# Altium PCB PCB2.PcbDoc
Units mil, origin at the board's own origin, x right, y up, seen from the top; angles counter-clockwise.
Board outline 1775 x 1520 mil, 2 copper layers (Top Layer, Bottom Layer); 39 components, 26 nets, 118 pads, 437 vias.
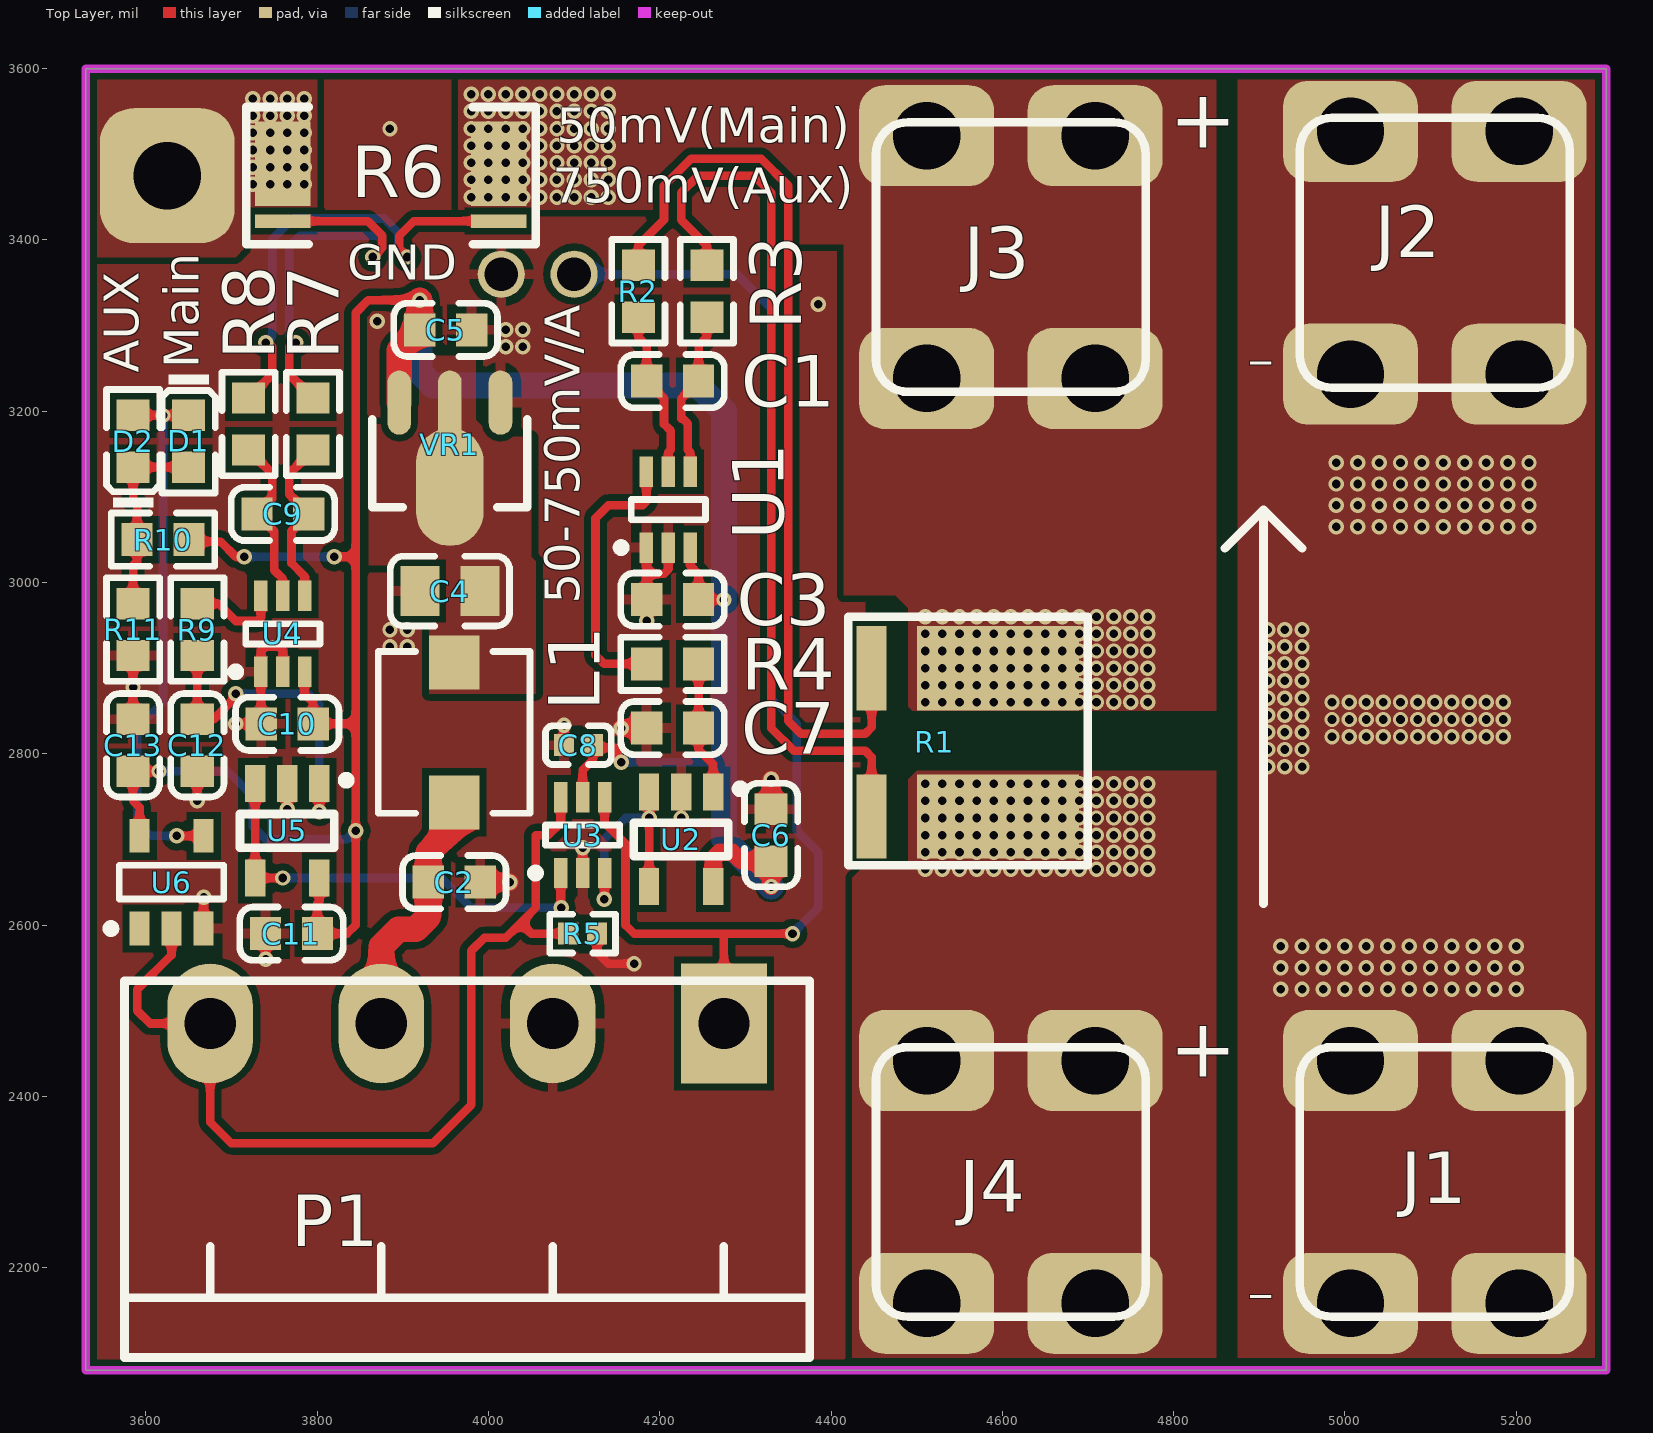
[diagram p0: Top Layer view]
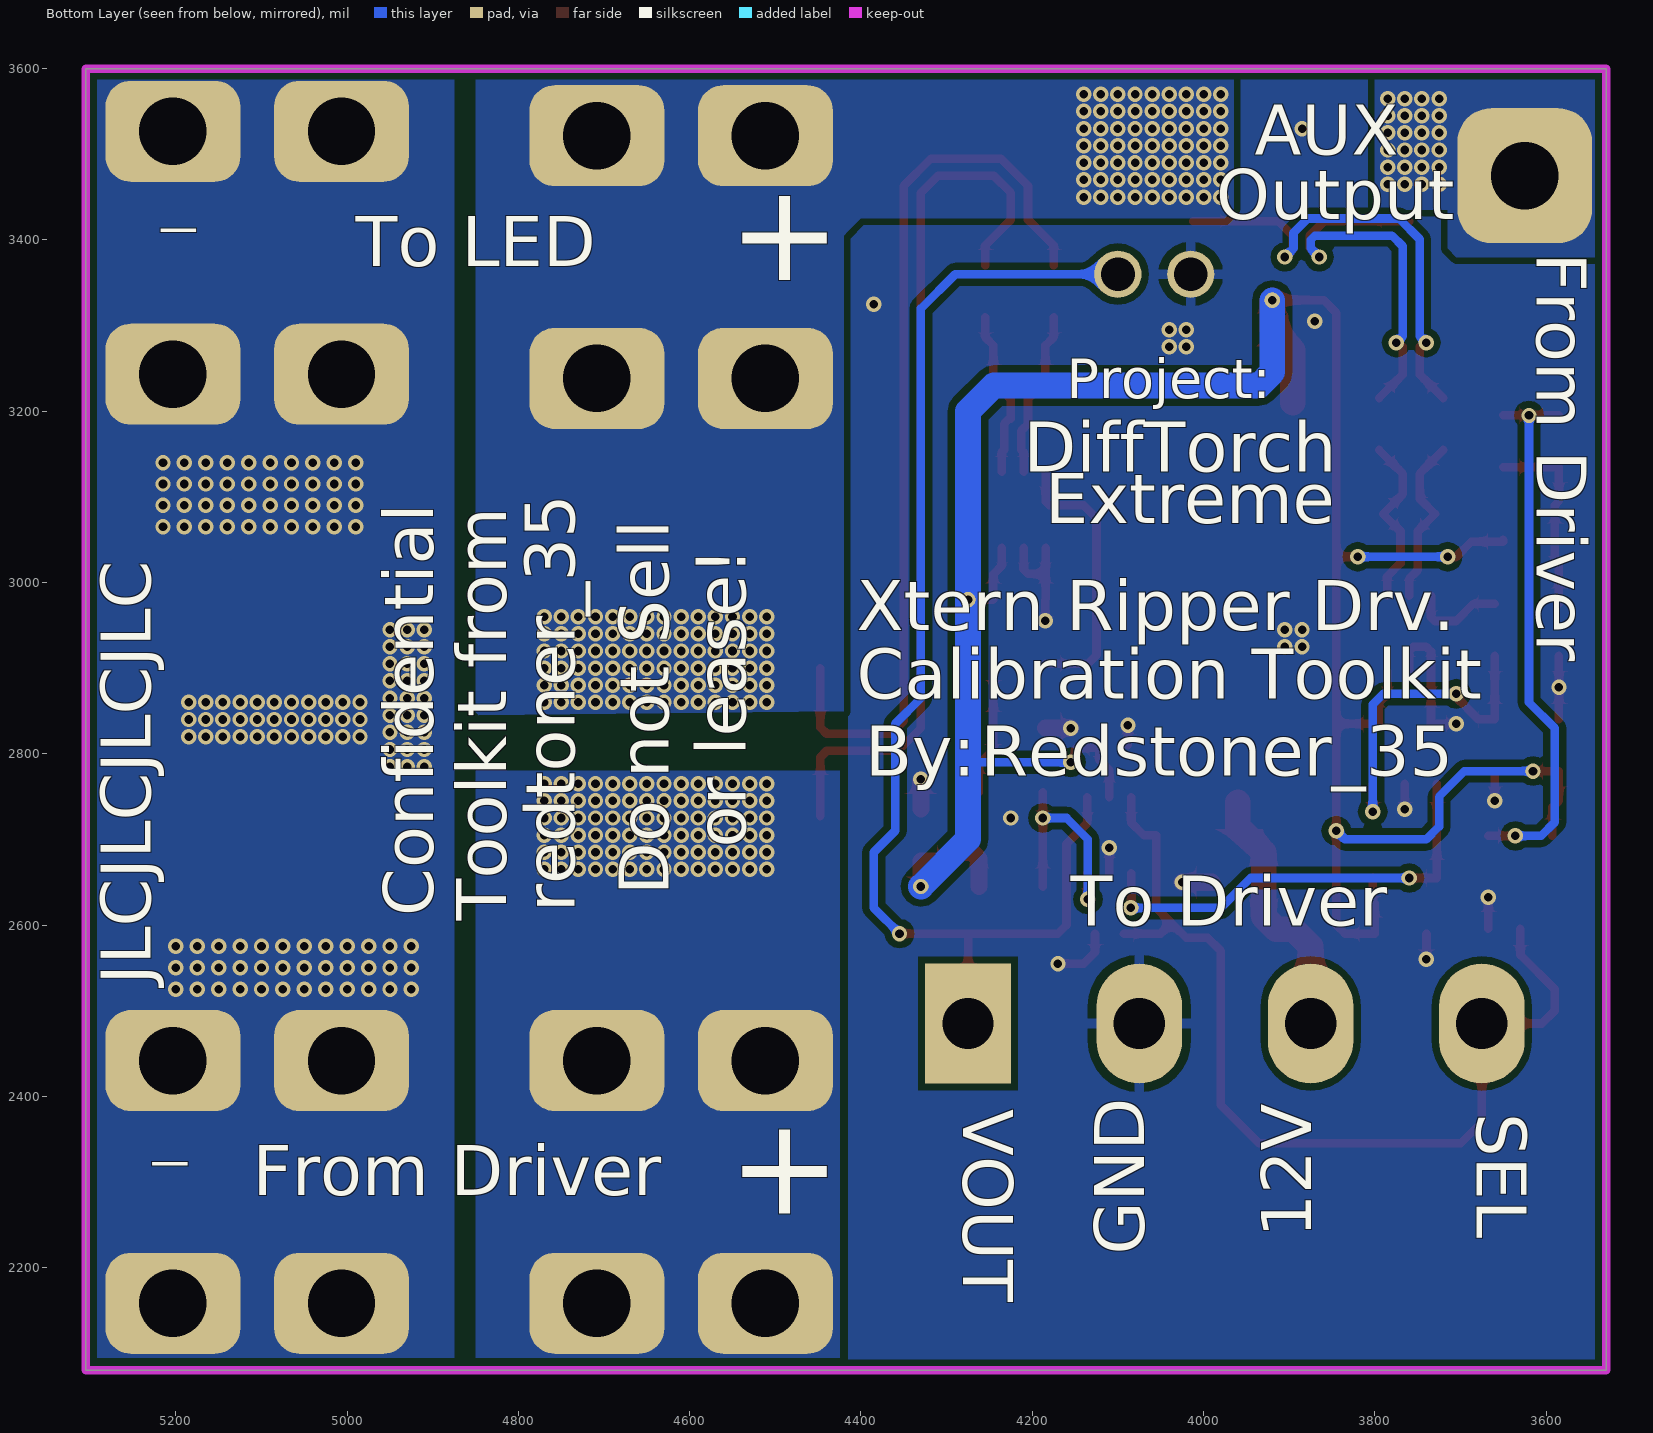
[diagram p1: Bottom Layer view, seen from below]
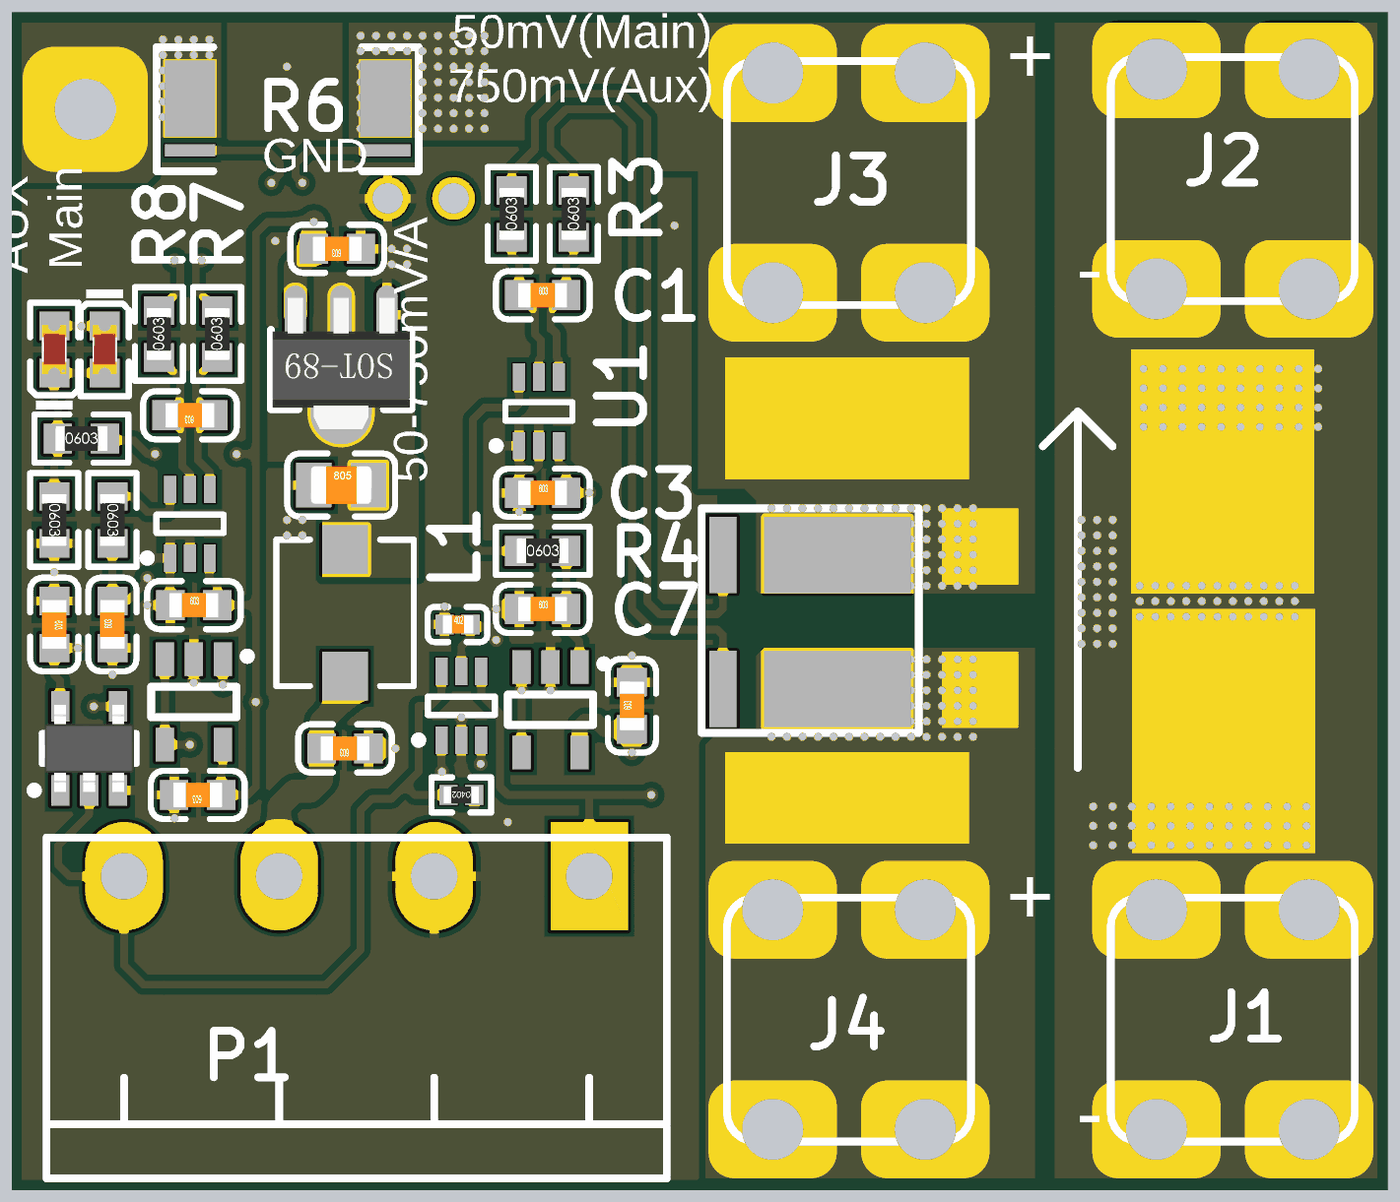
[diagram p2: 3D render of the assembled board from above, using the file's embedded part models]

## Layer stack, top to bottom
Top Solder: solder mask 0.4, Solder Resist, Dk 3.5
Top Layer: signal copper 1.4
Dielectric 1: dielectric 12.6, FR-4, Dk 4.8
Bottom Layer: signal copper 1.4
Bottom Solder: solder mask 0.4, Solder Resist, Dk 3.5

## Board outline
3530,2080 5305,2080 5305,3600 3530,3600

## Design rules (kind name [scope] priority, off if disabled: settings)
Clearance [All] p1: gap=8
DiffPairsRouting [All] p1: maxlimit=10 minlimit=10 mostfreqgap=10 toplayer_minwidth=10 toplayer_maxwidth=13 toplayer_prefwidth=12 bottomlayer_minwidth=10 bottomlayer_maxwidth=13 bottomlayer_prefwidth=12 maxuncoupledlength=500
PolygonConnect PolygonConnect_1 [IsVia] p1: connectstyle=Direct reliefconductorwidth=10 reliefentries=4 polygonreliefangle="90 Angle" airgapwidth=10
PolygonConnect [All] p2: connectstyle=Relief reliefconductorwidth=12 reliefentries=4 polygonreliefangle="90 Angle" airgapwidth=10
RoomDefinition main [InComponentClass('main')] p1: confinementstyle=ConfineIn formatcopy=TRUE lockcomponents=FALSE outline 7045,1060 10275,1060 10275,1655 7045,1655
RoutingVias [All] p1: holewidth=28 width=50 viastyle="Through Hole" minholewidth=28 minwidth=50 maxholewidth=28 maxwidth=50
SolderMaskExpansion [All] p1: expansion=4
Width [All] p1: maxlimit=100 minlimit=10 preferedwidth=10
29 further rules are at their usual default settings.

## Classes and differential pairs
differential pair AS: +AS_P -AS_N
differential pair AUXSENS: +AUXSENS_P -AUXSENS_N
differential pair SENS: +SENS_P -SENS_N
differential pair S: +S_P -S_N

## Components (designator, comment, footprint, x,y, rotation, side; value= is the part's Value field where it differs from the comment)
C1 "68nF (683) 10% 50V" 0603_C 4215,3235 r0 top
C2 "100nF (104) 10% 50V" 0603_C 3960,2650 r180 top
C3 "10uF (106) 10% 10V" 0603_C 4215,2980 r0 top
C4 "22uF (226) 20% 25V" 0805_C 3955,2990 r0 top
C5 "100nF (104) 10% 50V" 0603_C 3950,3295 r180 top
C6 "100nF (104) 10% 50V" 0603_C 4330,2705 r90 top
C7 "1uF (105) 10% 50V" 0603_C 4215,2830 r0 top
C8 "100nF (104) 10% 16V" 0402_C 4105,2810 r0 top
C9 "68nF (683) 10% 50V" 0603_C 3760,3080 r180 top
C10 "100nF (104) 10% 50V" 0603_C 3765,2835 r0 top
C11 "100nF (104) 10% 50V" 0603_C 3770,2590 r180 top
C12 "1uF (105) 10% 50V" 0603_C 3660,2810 r90 top
C13 "100nF (104) 10% 50V" 0603_C 3585,2810 r270 top
D1 "绿灯 0603" 0603_LED_S1 3650,3165 r270 top
D2 "黄灯 0603" 0603_LED_S1 3585,3165 r90 top
J1 "K14" k14端子 5105,2300 r0 top
J2 "K14" k14端子 5105,3385 r0 top
J3 "K14" k14端子 4610,3380 r0 top
J4 "K14" k14端子 4610,2300 r0 top
L1 "0420" IND0420 3960,2825 r90 top
P1 "CON 4" KF2EDGR5.08/4 4275,2485 r180 top
R1 "6669 1mR" Shunt6669 4595,2900 r270 top locked
R2 "10Ω (10R0) ±1%" 0603_R 4175,3340 r90 top
R3 "10Ω (10R0) ±1%" 0603_R 4255,3340 r90 top
R4 "2KΩ (2001) ±1%" 0603_R 4215,2905 r0 top
R5 "10KΩ (1002) ±1%" 0402_R 4110,2590 r180 top
R6 "2512 15mR" 2512-Virtual4Wire 3760,3485 r0 top
R7 "10Ω (10R0) ±1%" 0603_R 3795,3185 r90 top
R8 "10Ω (10R0) ±1%" 0603_R 3720,3185 r90 top
R9 "2KΩ (2001) ±1%" 0603_R 3660,2945 r270 top
R10 "4.7KΩ (4701) ±1%" 0603_R 3620,3050 r0 top
R11 "4.7KΩ (4701) ±1%" 0603_R 3585,2945 r270 top
U1 "INA199A1DCKR" SC70-6 4210,3085 r90 top
U2 "LMV321IDBVRG4" SOT-23-5 4225,2700 r90 top
U3 "CH443k" SC70-6 4110,2705 r90 top
U4 "INA199A1DCKR" SC70-6 3760,2940 r90 top
U5 "LMV321IDBVRG4" SOT-23-5 3765,2710 r90 top
U6 "SN74LVC1G17DBVR" DBV0005A_N 3630,2650 r90 top
VR1 "HT7533-1" SOT-89(SOT-89-3) 3955,3210 r90 top

## Footprints (in the part's own frame and the unit in brackets; to place one, negate y for a bottom-side part, rotate by r counter-clockwise, add the part's x,y. Pads: shape width x height; smd on the part's side, far side on the other; paste and mask are expansions set on the pad)
0402_C [mm]
  rect 0.6x0.65 smd mask+0.051: 1(-0.425,0) 2(0.425,0)
  silkscreen extent -0.97,-0.58 0.97,0.58, body extent -0.48,-0.3 0.52,0.3, height 0.2
0402_R [mm]
  rect 0.6x0.65 smd mask+0.051: 1(-0.425,0) 2(0.425,0)
  silkscreen extent -0.97,-0.58 0.97,0.58, body extent -0.57,-0.27 0.58,0.28, height 0.41
0603_C [mm]
  rect 0.93x0.98 smd: 1(-0.77,0) 2(0.77,0)
  silkscreen extent -1.53,-0.79 1.54,0.79, body extent -0.8,-0.4 0.8,0.4, height 0.3
0603_LED_S1 [mm]
  rect 0.93x0.98 smd: A(0.77,0) K(-0.77,0)
  silkscreen extent -1.98,-0.79 1.54,0.79, body extent -0.8,-0.4 0.8,0.4, height 0.6
0603_R [mm]
  rect 0.93x0.98 smd: 1(-0.77,0) 2(0.77,0)
  silkscreen extent -1.53,-0.79 1.54,0.79, body extent -0.85,-0.4 0.85,0.4, height 0.56
0805_C [mm]
  rect 1.16x1.47 smd: 1(-0.89,0) 2(0.89,0)
  silkscreen extent -1.77,-1.04 1.77,1.04, body extent -1,-0.62 1,0.63, height 0.77
2512-Virtual4Wire [mm] "2512 Shunt Resistor Virtual 4Wire Connection"
  rect 1.65x2.5 smd mask+0.05: 0(0,0.1) 1(6.401,0.1)
  rect 1.65x0.4 smd mask+0.05: 2(0,-1.6) 3(6.401,-1.6)
  silkscreen extent -1.09,-2.28 7.49,1.78, body extent 0,-1.78 6.48,1.4, height 1
DBV0005A_N [mm] "SOT23, 5-Leads, Body 3.05x1.75mm, Pitch 0.95mm, IPC Medium Density"
  rect 1x0.6 smd: 1(-1.375,0.95) 2(-1.375,0) 3(-1.375,-0.95) 4(1.375,-0.95) 5(1.375,0.95)
  silkscreen extent -1.5,-1.55 0.5,1.92, body extent -1.42,-1.46 1.42,1.46, height 1.45
IND0420 [mm] "Molded Inductor, 2-Leads, Body 4.67x4.45mm, IPC Medium Density"
  rect 1.6x1.5 smd: 1(-2.075,0) 2(2.075,0)
  silkscreen extent -2.4,-2.25 2.4,2.25, body extent -2.37,-2.25 2.38,2.25, height 2
k14端子 [mm]
  rrect50% 4x3 hole 2: 1(-2.5,-3.6) 1(-2.5,3.6) 1(2.5,-3.6) 1(2.5,3.6)
  silkscreen extent -4,-4 4,4
KF2EDGR5.08/4 [mil]
  rect 100x140 hole 60: 1(0,0)
  oval 100x140 hole 60: 2(200,0) 3(400,0) 4(600,0)
  silkscreen extent -100,-50 700,390
SC70-6 [mm] "SOT23, 6-Leads, Body 2.00x2.10mm, Pitch 0.65mm, IPC Medium Density"
  rect 0.9x0.4 smd mask+0.05: 1(-1.125,0.65) 2(-1.125,0) 3(-1.125,-0.65) 4(1.125,-0.65) 5(1.125,0) 6(1.125,0.65)
  silkscreen extent -1.25,-1.1 0.3,1.52, body extent -0.67,-1.1 0.67,1.1, height 1.1
Shunt6669 [mm] "Shunt Res 1mR 4W 4wire"
  rect 2.5x4.8 smd: 0(0,0) 1(4.4,0)
  rect 2.5x0.9 smd: 2(0,-3.75) 3(4.4,-3.75)
  silkscreen extent -1.52,-4.44 5.84,2.67
SOT-23-5 [mm]
  rect 1.1x0.6 smd: 1(1.4,-0.95) 2(1.4,0) 3(1.4,0.95) 4(-1.4,0.95) 5(-1.4,-0.95)
  silkscreen extent -0.5,-1.88 1.62,1.4
SOT-89(SOT-89-3) [mm]
  oval 1.9x0.7 smd: 1(0,-1.5) 3(0,1.5)
  oval 3.5x2 smd: 2(-2.5,0)
  oval 2.1x0.7 smd: 2(-0.1,0)
  silkscreen extent -3.1,-2.3 -0.5,2.3, body extent -3.75,-2.25 0.55,2.25, height 1.51

## Part data
C1 C9: library part "0603 68nF (683) 10% 50V", "贴片电容"
C2 C5 C6 C10 C11 C13: library part "0603 100nF (104) 10% 50V", "贴片电容"
C3: library part "0603 10uF (106) 10% 10V", "贴片电容"
C4: library part "0805 22uF (226) 20% 25V", "贴片电容"
C7 C12: library part "0603 1uF (105) 10% 50V", "贴片电容"
C8: library part "0402 100nF (104) 10% 16V", "贴片电容"
D1: library part "0603 绿灯", "发光二极管"
D2: library part "0603 黄灯", "发光二极管"
J1 J2 J3 J4: library part "Con 1"
L1: library part "Inductor Iron", "Magnetic-Core Inductor"
P1: "4-Pin"
R1: library part shunt, "4wire shunt 6669 1mR"
R2 R3 R7 R8: library part "0603 10Ω (10R0) 1%", "贴片电阻"
R4 R9: library part "0603 2KΩ (2001) 1%", "贴片电阻"
R5: library part "0402 10KΩ (1002) 1%", "贴片电阻"
R6: library part shunt, "2512检流电阻 15mR"
R10 R11: library part "0603 4.7KΩ (4701) 1%", "贴片电阻"
U1 U4: library part INA199A2DCKR, "50Khz 50V/V 26V Max High Side Current Op Amp."
U2 U5: library part LMV321IDBVRG4_[C7972], "运放"
U3: library part NC7SB3157P6X, "Low-Voltage Analog Switch SPDT,1.8-5V Power"
U6: "Single Schmitt-Trigger Buffer, DBV0005A, LARGE T&R"
VR1: library part "SOT-89 HT7533-1", "低压差线性稳压(LDO)"

## Free pads (board coordinates)
  rrect50% 157.48x157.48 hole 78.74 mask+1.97: 0(3625,3475)
  round 55.12 hole 39.37 mask+1.97: 1(4015,3360) 2(4100,3360)

## Via types
v1: diameter 18, hole 10, Top Layer to Bottom Layer, tented both sides, 437 vias

## Nets (pads, with @x,y where several pads share a name; then routed paths per layer and width w, separated by ;. In a path a pad name is that pad's centre, name@x,y a point inside that pad or via, vN(x,y) a via of type N, cw(c..) or ccw(c..) an arc to the next point about the centre after c; other vN are vias at no path point)
3V3: C3.2 C5.2 C6.1 C8.2 C10.2 C11.1 C13.2 R10.2 U1.3 U2.5 U3.5 U4.3 U5.5 U6.5 VR1.3 | length 3250
  Top Layer w10: U6.5 3592.6,2737.4 3585,2745 C13.2 v1(3615.32,2779.68) ; R10.2 3650.32,3047.71 3687.29,3047.71 3705,3030 v1(3715,3030) ; U4.3 3785,2895.12 3785,2870 3795.32,2859.68 C10.2 3845,2835 ; U5.5 3802.4,2627.4 3800.32,2625.32 C11.1 3835,2590 3845,2600 v1(3845,2710) 3845,2835 ; v1(3820,3030) 3845,3030 ; v1(3919.68,3329.68) 3859.68,3329.68 3845,3315 3845,3030 ; U3.5 4110,2781.13 4121.73,2792.86 C8.2@4121.73,2807 ; C8.2 C8.2@4121.73,2807 ; v1(4155,2790) 4150,2795 4150,2805 4148,2807 C8.2@4121.73,2807 ; U1.3 4235.59,3019.41 4245.31,3009.68 C3.2 v1(4275,2980) ; 3845,2835 3845,3030
  Top Layer w20: U2.5 4262.4,2677.4 4270,2685 4285,2685 4295.31,2674.68 C6.1 v1(4330,2645)
  Top Layer w30: VR1.3 3895.94,3271.26 C5.2 v1(3919.68,3329.68)
  Bottom Layer w10: v1(3615.32,2779.68) 3695.32,2779.68 3725,2750 3725,2715 3740,2700 3835,2700 v1(3845,2710) ; v1(3715,3030) v1(3820,3030) ; v1(4155,2790) 4270,2790
  Bottom Layer w30: v1(3919.68,3329.68) 3919.68,3245.32 3935,3230 4245,3230 4275,3200 v1(4275,2980) 4275,2700 v1(4330,2645)
12V: C2.2 L1.1 P1.3 | length 305.2
  Top Layer w30: P1.3 3875,2575 3895,2595 3915,2595 3929.68,2609.68 C2.2 3929.68,2684.68 3960,2715 L1.1
AS_N: R6.3 R8.2 | length 543.6
  Top Layer w10: R8.2 3747.5,3242.82 3747.5,3275 ; v1(3905,3380) 3896,3389 3896,3405 3913.01,3422.01 R6.3
  Bottom Layer w10: v1(3740,3280) 3747.5,3287.5 3747.5,3400.78 3771.72,3425 3878.28,3425 3895,3408.28 3895,3390 v1(3905,3380)
AS_P: R6.2 R7.2 | length 478.2
  Top Layer w10: R6.2 3859,3422.01 3876,3405 3876,3391 v1(3865,3380) ; 3767.5,3275 3767.5,3242.82 R7.2
  Bottom Layer w10: v1(3775,3280) 3767.5,3287.5 3767.5,3392.5 3780,3405 3870,3405 3875,3400 3875,3390 v1(3865,3380)
AUXBUCK: pad.0 R6.0
  other v1: 3725,3465 3745,3465 3765,3465 3785,3465 3725,3485 3745,3485 3765,3485 3785,3485 3725,3505 3745,3505 3765,3505 3785,3505 3725,3525 3745,3525 3765,3525 3785,3525 3725,3545 3745,3545 3765,3545 3785,3545 3725,3565 3745,3565 3765,3565 3785,3565
AUXSENS_N: C9.2 R8.1 U4.5 | length 201.7
  Top Layer w10: R8.1 3747.5,3127.19 3747.5,3097.82 C9.2 3750,3059.68 3750,3014.31 3760,3004.31 U4.5
AUXSENS_P: C9.1 R7.1 U4.4 | length 206.1
  Top Layer w10: U4.4 3785.59,3007.01 3770,3022.6 3770,3059.68 C9.1 3767.5,3102.82 3767.5,3127.19 R7.1
AUXVO: U3.1 U5.3 U5.4 | length 523
  Top Layer w10: U5.3 U5.4 v1(3759.88,2654.88) ; U3.1 4084.41,2620.59 v1(4085,2620)
  Bottom Layer w10: v1(3759.88,2654.88) 3945.12,2654.88 3980,2620 v1(4085,2620)
AUXVOUT: R9.1 U4.6 | length 109.5
  Top Layer w10: R9.1 3684.69,2975.31 3705,2955 3730,2955 3734.41,2959.41 U4.6
GND: C2.1 C3.1 C4.1 C5.1 C6.2 C7.1 C8.1 C10.1 C11.2 C12.1 C13.1 P1.2 pad.1 R5.1 R11.2 U1.1 U1.2 U2.2 U3.2 U4.1 U4.2 U5.2 U6.3 VR1.1 | length 734.7
  Top Layer w10: C13.1 R11.2 ; v1(3660,2745) C12.1 ; U6.3 v1(3667.4,2632.6) ; v1(3705,2835) C10.1 3734.41,2835.28 U4.1 3734.41,2919.41 3740,2925 3755,2925 3760,2920 U4.2 ; v1@3739.68,2560.32 C11.2 ; v1(3765,2735) U5.2 ; C8.1 v1(4088.27,2833.27) ; U3.2 v1(4110,2690) ; R5.1 4126.73,2568.27 4140,2555 v1(4170,2555) ; C3.1@4184.41,2980.28 4184.41,3010 ; U1.1 4184.41,3010 ; v1(4184.69,2955.32) C3.1 ; U1.2 4210,3015 4205,3010 4184.41,3010
  Top Layer w20: C2.1 v1(4025,2650) ; v1(4155,2830) C7.1 ; C6.2 v1(4330,2770)
  other v1: 3740,2560 4225,2725 3585,2877.5 3885,2925 3905,2925 3885,2945 3905,2945 4020,3275 4040,3275 4020,3295 4040,3295 3870,3305 4385,3325 3885,3530
LEDGND: J1.1 J2.1
  other v1: 4925,2525 4950,2525 4975,2525 5000,2525 5025,2525 5050,2525 5075,2525 5100,2525 5125,2525 5150,2525 5175,2525 5200,2525 4925,2550 4950,2550 4975,2550 5000,2550 5025,2550 5050,2550 5075,2550 5100,2550 5125,2550 5150,2550 5175,2550 5200,2550 4925,2575 4950,2575 4975,2575 5000,2575 5025,2575 5050,2575 5075,2575 5100,2575 5125,2575 5150,2575 5175,2575 5200,2575 4910,2785 4930,2785 4950,2785 4910,2805 4930,2805 4950,2805 4985,2820 5005,2820 5025,2820 5045,2820 5065,2820 5085,2820 5105,2820 5125,2820 5145,2820 5165,2820 5185,2820 4910,2825 4930,2825 4950,2825 4985,2840 5005,2840 5025,2840 5045,2840 5065,2840 5085,2840 5105,2840 5125,2840 5145,2840 5165,2840 5185,2840 4910,2845 4930,2845 4950,2845 4985,2860 5005,2860 5025,2860 5045,2860 5065,2860 5085,2860 5105,2860 5125,2860 5145,2860 5165,2860 5185,2860 4910,2865 4930,2865 4950,2865 4910,2885 4930,2885 4950,2885 4910,2905 4930,2905 4950,2905 4910,2925 4930,2925 4950,2925 4910,2945 4930,2945 4950,2945 4990,3065 5015,3065 5040,3065 5065,3065 5090,3065 5115,3065 5140,3065 5165,3065 5190,3065 5215,3065 4990,3090 5015,3090 5040,3090 5065,3090 5090,3090 5115,3090 5140,3090 5165,3090 5190,3090 5215,3090 4990,3115 5015,3115 5040,3115 5065,3115 5090,3115 5115,3115 5140,3115 5165,3115 5190,3115 5215,3115 4990,3140 5015,3140 5040,3140 5065,3140 5090,3140 5115,3140 5140,3140 5165,3140 5190,3140 5215,3140
MBVO: U2.3 U2.4 U3.3 | length 273.3
  Top Layer w10: v1@4135.59,2630.59 U3.3 ; U2.4 v1(4187.6,2725) U2.3
  Bottom Layer w10: v1(4135,2630) 4135,2700 4160,2725 v1(4187.6,2725)
NetC4_2: C4.2 L1.2 VR1.2
NetC7_2: C7.2 R4.2 U2.1 | length 157
  Top Layer w10: R4.2 C7.2 4245.31,2804.68 4262.4,2787.6 U2.1
NetC12_2: C12.2 R9.2 U5.1 | length 394.4
  Top Layer w10: R9.2 C12.2 3679.2,2840.32 3705,2866.11 v1(3705,2870) ; v1(3802.4,2732.4) U5.1
  Bottom Layer w10: v1(3705,2870) 3790,2870 3802.4,2857.6 v1(3802.4,2732.4)
NetD1_A: D1.A D2.K R10.1 R11.1 | length 228.1
  Top Layer w10: R11.1 3585,3020 3589.69,3024.69 R10.1 3589.69,3089.69 ; 3590,3090 3585,3095 D2.K D1.A
NetD1_K: D1.K D2.A U6.4 | length 636.4
  Top Layer w10: D2.A D1.K ; v1(3635.87,2704.13) U6.4
  Bottom Layer w10: v1(3620,3195) 3620,2860 3590,2830 3590,2720 3605.87,2704.13 v1(3635.87,2704.13)
NetJ4_1: J4.1 R1.1
  other v1: 4510,2665 4530,2665 4550,2665 4570,2665 4590,2665 4610,2665 4630,2665 4650,2665 4670,2665 4690,2665 4710,2665 4730,2665 4750,2665 4770,2665 4510,2685 4530,2685 4550,2685 4570,2685 4590,2685 4610,2685 4630,2685 4650,2685 4670,2685 4690,2685 4710,2685 4730,2685 4750,2685 4770,2685 4510,2705 4530,2705 4550,2705 4570,2705 4590,2705 4610,2705 4630,2705 4650,2705 4670,2705 4690,2705 4710,2705 4730,2705 4750,2705 4770,2705 4510,2725 4530,2725 4550,2725 4570,2725 4590,2725 4610,2725 4630,2725 4650,2725 4670,2725 4690,2725 4710,2725 4730,2725 4750,2725 4770,2725 4510,2745 4530,2745 4550,2745 4570,2745 4590,2745 4610,2745 4630,2745 4650,2745 4670,2745 4690,2745 4710,2745 4730,2745 4750,2745 4770,2745 4510,2765 4530,2765 4550,2765 4570,2765 4590,2765 4610,2765 4630,2765 4650,2765 4670,2765 4690,2765 4710,2765 4730,2765 4750,2765 4770,2765
S_N: R1.2 R2.2 | length 1077.4
  Top Layer w10: R2.2 4175,3393.62 4205,3423.62 4205,3463.28 4236.72,3495 4318.28,3495 4350,3463.28 4350,2838.39 4365,2823.39 4440,2823.39 4447.36,2830.75 R1.2
S_P: R1.3 R3.2 | length 1044.3
  Top Layer w10: R3.2 4255,3393.62 4225,3423.62 4225,3455 4245,3475 4310,3475 4330,3455 4330,2830.1 4356.72,2803.39 4440,2803.39 4447.36,2796.02 R1.3
SEL: P1.4 R5.2 U3.6 U6.2 | length 1139.6
  Top Layer w10: U6.2 3630,2565 3590,2525 3590,2500 3605,2485 P1.4 3675,2370 3700,2345 3935,2345 3980,2390 3980,2570 3995,2585 4020,2585 4037.5,2602.5 ; U3.6 4084.41,2719.41 4070,2705 4055,2705 4055,2620 4037.5,2602.5 ; R5.2 4050,2590 4037.5,2602.5
SENS_N: C1.1 R2.1 U1.5 | length 197.2
  Top Layer w10: R2.1 4175,3286.38 4184.69,3276.69 C1.1 4205,3214.68 4205,3185 4212.8,3177.2 4212.8,3154.8 4210,3152.01 U1.5
SENS_P: C1.2 R3.1 U1.4 | length 196.4
  Top Layer w10: 4225,3191.35 4225,3214.68 C1.2 4245.31,3276.69 4255,3286.38 R3.1 ; 4226.94,3191.35 4232.8,3185.49 4232.8,3154.8 4235.59,3152.01 U1.4
SV: P1.1 pad.2 U3.4 | length 1471.6
  Top Layer w10: U3.4 4135.59,2719.41 4160,2695 4160,2600 4170,2590 v1(4355,2590) ; P1.1 4275,2586.26
  Bottom Layer w10: pad.2 4290,3360 4330,3320 4330,2865 4360,2835 4360,2710 4385,2685 4385,2620 v1(4355,2590)
VLED: J3.1 R1.0 R6.1
  other v1: 4510,2860 4530,2860 4550,2860 4570,2860 4590,2860 4610,2860 4630,2860 4650,2860 4670,2860 4690,2860 4710,2860 4730,2860 4750,2860 4770,2860 4510,2880 4530,2880 4550,2880 4570,2880 4590,2880 4610,2880 4630,2880 4650,2880 4670,2880 4690,2880 4710,2880 4730,2880 4750,2880 4770,2880 4510,2900 4530,2900 4550,2900 4570,2900 4590,2900 4610,2900 4630,2900 4650,2900 4670,2900 4690,2900 4710,2900 4730,2900 4750,2900 4770,2900 4510,2920 4530,2920 4550,2920 4570,2920 4590,2920 4610,2920 4630,2920 4650,2920 4670,2920 4690,2920 4710,2920 4730,2920 4750,2920 4770,2920 4510,2940 4530,2940 4550,2940 4570,2940 4590,2940 4610,2940 4630,2940 4650,2940 4670,2940 4690,2940 4710,2940 4730,2940 4750,2940 4770,2940 4510,2960 4530,2960 4550,2960 4570,2960 4590,2960 4610,2960 4630,2960 4650,2960 4670,2960 4690,2960 4710,2960 4730,2960 4750,2960 4770,2960 3980,3450 4000,3450 4020,3450 4040,3450 4060,3450 4080,3450 4100,3450 4120,3450 4140,3450 3980,3470 4000,3470 4020,3470 4040,3470 4060,3470 4080,3470 4100,3470 4120,3470 4140,3470 3980,3490 4000,3490 4020,3490 4040,3490 4060,3490 4080,3490 4100,3490 4120,3490 4140,3490 3980,3510 4000,3510 4020,3510 4040,3510 4060,3510 4080,3510 4100,3510 4120,3510 4140,3510 3980,3530 4000,3530 4020,3530 4040,3530 4060,3530 4080,3530 4100,3530 4120,3530 4140,3530 3980,3550 4000,3550 4020,3550 4040,3550 4060,3550 4080,3550 4100,3550 4120,3550 4140,3550 3980,3570 4000,3570 4020,3570 4040,3570 4060,3570 4080,3570 4100,3570 4120,3570 4140,3570
VOUT: R4.1 U1.6 | length 326.2
  Top Layer w10: U1.6 4184.41,3094.41 4180,3090 4140,3090 4125,3075 4125,2915 4135,2905 R4.1
pads on no net: U6.1

## Polygon pours and split planes (outlines as drawn)
GND on Top Layer "Component Side-No Net 1" (solid, remove dead copper, pour order 22): 3530,3600 4420,3600 4440,3580 4440,2080 3530,2080 3530,2140
AUXBUCK on Top Layer "Component Side-No Net 1" (solid, remove dead copper, pour order 18): 3800,3600 3800,3435 3735,3435 3725,3435 3715,3425 3715,3410 3715,3390 3705,3380 3585,3380 3530,3380 3530,3600
VLED on Top Layer "Component Side-No Net 1" (solid, remove dead copper, pour order 14): 3965,3600 3965,3435 4310,3435 4350,3395 4520,3395 4520,3600
VLED on Top Layer "Component Side-No Net 1" (solid, remove dead copper, pour order 2): 4415,3585 4850,3585 4850,2850 4505,2850 4495,2850 4490,2855 4490,2895 4490,2970 4475,2985 4415,2985
NetJ4_1 on Top Layer "Component Side-No Net 1" (solid, remove dead copper, pour order 8): 4850,2780 4500,2780 4490,2770 4490,2675 4480,2665 4440,2665 4435,2665 4425,2655 4425,2590 4425,2095 4805,2095 4850,2095
LEDGND on Top Layer "Component Side-No Net 1" (solid, remove dead copper, pour order 10): 4875,3585 4875,2915 4875,2095 5075,2095 5300,2095 5300,2130 5300,3600 4875,3600
VLED on Top Layer "Component Side-No Net 1" (solid, remove dead copper, pour order 18): 4850,3555 4850,3600 4415,3600 4415,3500 4845,3500 4850,3495
NetC4_2 on Top Layer "Component Side-No Net 1" (solid, remove dead copper, pour order 20): 3915,3265 3985,3265 3985,3190 4000,3175 4005,3170 4050,3170 4050,3030 4055,3025 4055,2870 3930,2870 3930,2940 3930,2960 3930,3020 3870,3020 3865,3020 3860,3020 3860,3090 3860,3185 3915,3185
GND on Bottom Layer "Component Side-No Net 1" (solid, remove dead copper, pour order 24): 4415,3570 4415,2085 4410,2080 3530,2080 3530,3600 3525,3605 3550,3630 4410,3630
AUXBUCK on Bottom Layer "Component Side-No Net 1" (solid, remove dead copper, pour order 20): 3800,3600 3800,3435 3715,3435 3715,3390 3705,3380 3530,3380 3530,3600
VLED on Bottom Layer "Component Side-No Net 1" (solid, remove dead copper, pour order 16): 3965,3600 3965,3435 3975,3425 4385,3425 4400,3425 4435,3390 4440,3385 4635,3385 4635,3600
LEDGND on Bottom Layer "Component Side-No Net 1" (solid, remove dead copper, pour order 12): 4875,3600 5300,3600 5300,2095 4875,2095
NetJ4_1 on Bottom Layer "Component Side-No Net 1" (solid, remove dead copper, pour order 14): 4500,2780 4425,2780 4425,2095 4850,2095 4850,2780
VLED on Bottom Layer "Component Side-No Net 1" (solid, remove dead copper, pour order 16): 4850,2845 4850,3600 4420,3600 4420,2849.78

## Keep-outs
Keep-Out Layer:
  the board outline again, w10

## Silkscreen, mask and mechanical layers (free items; w line width, h text height)
Top Overlay:
  lines w10: 4860,3040 4905,3085 ; 4905,2625 4905,3085 ; 4950,3040 4905,3085
  text "50mV(Main)" at 4080,3500 h70
  text "+" at 4795,3485 h118.11
  text "750mV(Aux)" at 4075,3430 h70
  text "GND" at 3835,3340 h70
  text "Main" at 3675,3250 h70 r90
  text "AUX" at 3605,3245 h70 r90
  text "-" at 4885,3210 h118.11
  text "50-750mV/A" at 4120,2975 h70 r90
  text "+" at 4795,2400 h118.11
  text "-" at 4885,2120 h118.11
Bottom Overlay:
  text "AUX" at 3940,3480 h100
  text "Output" at 3985,3405 h100
  text "From Driver" at 3630,3385 h100 r90
  text "To LED" at 4990,3350 h100
  text "-" at 5225,3335 h196.85
  text "+" at 4555,3315 h196.85
  text "Project:" at 4160,3200 h78.74
  text "DiffTorch" at 4210,3110 h100
  text "Extreme" at 4185,3050 h100
  text "Xtern Ripper Drv." at 4405,2925 h100
  text "Calibration Toolkit" at 4405,2845 h100
  text "Redstoner_35" at 4260,2755 h100
  text "By:" at 4395,2755 h100
  text "or lease!" at 4515,2690 h100 r270
  text "Do not Sell" at 4605,2635 h100 r270
  text "redtoner_35" at 4715,2615 h100 r270
  text "Confidential" at 4880,2610 h100 r270
  text "Toolkit from" at 4795,2605 h100 r270
  text "To Driver" at 4155,2580 h100
  text "JLCJLCJLCJLC" at 5210,2530 h100 r270
  text "VOUT" at 4300,2385 h100 r90
  text "SEL" at 3700,2380 h100 r90
  text "From Driver" at 5110,2265 h100
  text "-" at 5235,2245 h196.85
  text "12V" at 3855,2235 h100 r270
  text "+" at 4555,2225 h196.85
  text "GND" at 4050,2215 h100 r270
Top Solder:
  region: 5210,2850 5210,3164.96 4973.78,3164.96 4973.78,2850
  region: 5211.22,2515 5211.22,2829.96 4975,2829.96 4975,2515
  rectangle: 4450.04,2997.52 4765,3155
  rectangle: 4450,2526.89 4764.96,2645
  rectangle: 4730,2861.57 4828.43,2960
  rectangle: 4730,2676.57 4828.43,2775
Bottom Solder:
  rectangle: 3980,3490 4585,3550